# Altium PCB MainBoard.PcbDoc
Units mil, origin at the board's own origin, x right, y up, seen from the top; angles counter-clockwise.
Board outline 3974.39 x 3331.78 mil, 2 copper layers (Top Layer, Bottom Layer); 85 components, 126 nets, 380 pads, 84 vias.
Unrouted connection lines stored in the file: 34.
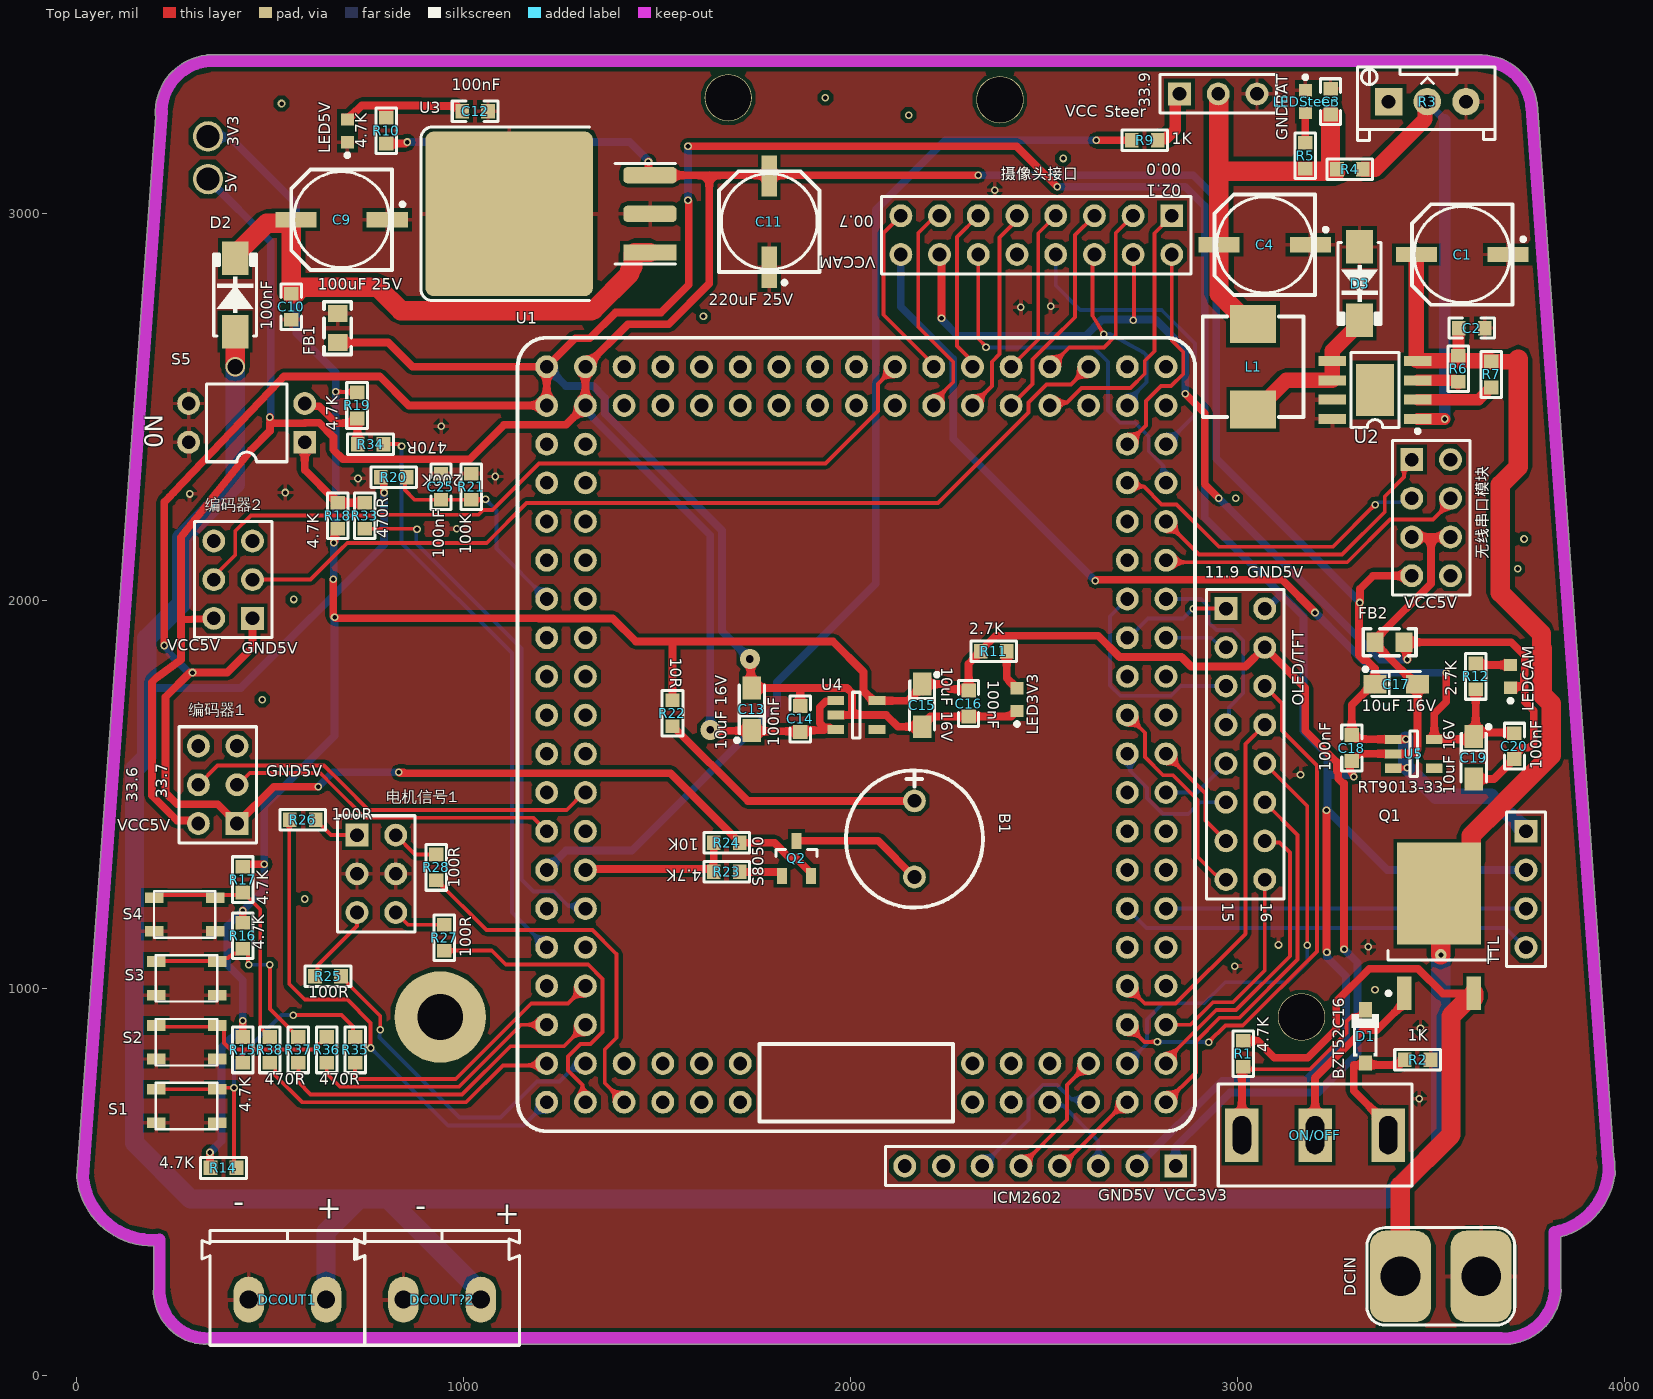
[diagram p0: Top Layer view]
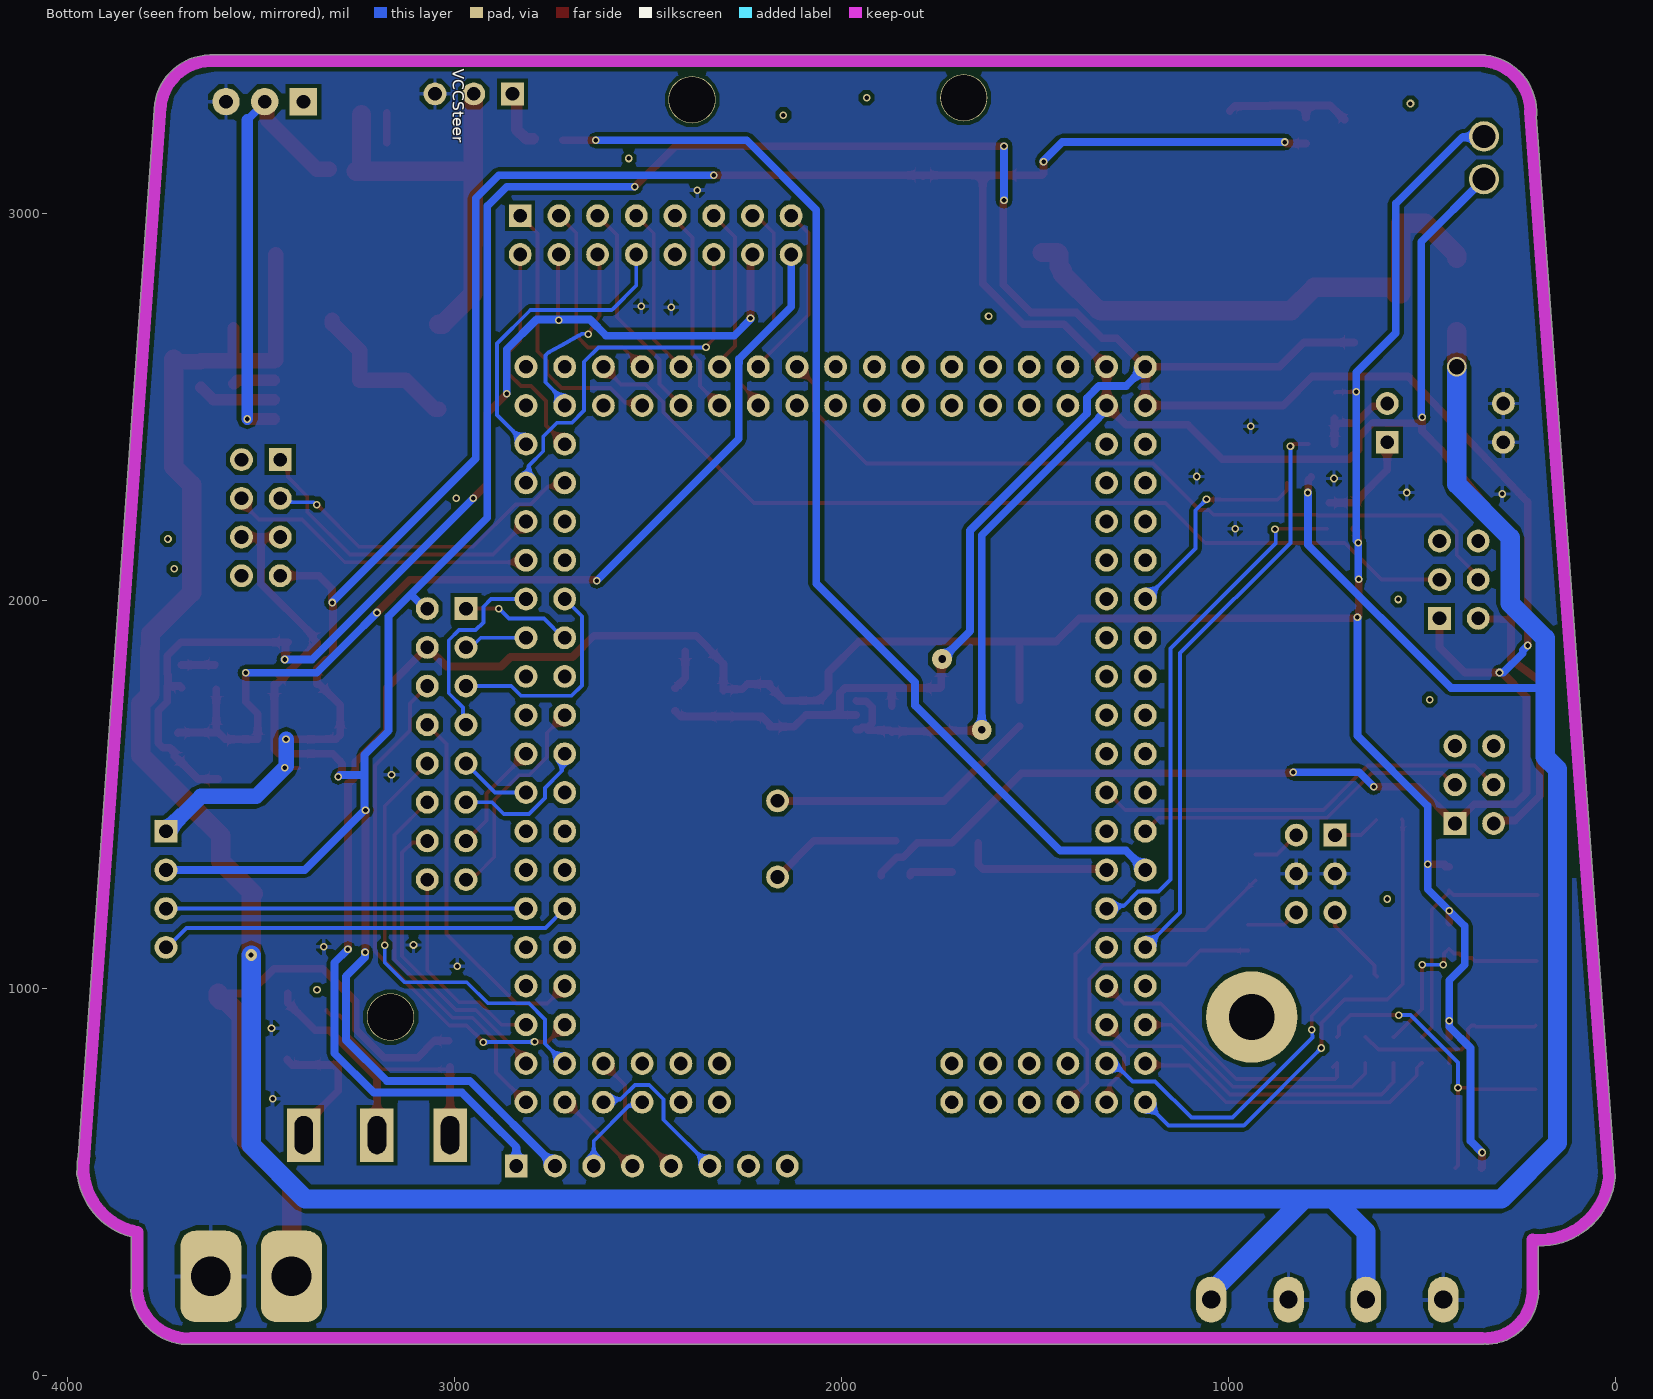
[diagram p1: Bottom Layer view, seen from below]

## Layer stack, top to bottom
Top Solder: solder mask 0.4, Solder Resist, Dk 3.5
Top Layer: signal copper 1.4
Dielectric 1: dielectric 12.6, FR-4, Dk 4.8
Bottom Layer: signal copper 1.4
Bottom Solder: solder mask 0.4, Solder Resist, Dk 3.5

## Board outline
199.24,225.47 199.24,333.31 cw(c196.59,529.76) 1.15,509.74 cw(c16.83,511.35) 1.11,512.55 204.5,3252.14 cw(c220,3255) 204.26,3254.11 cw(c352.5,3262.5) 334.96,3409.94 cw(c340,3395) 340,3410.76 345.08,3410.76 3619.57,3410.76 cw(c3627.5,3262.5) 3775.74,3270.89 cw(c3760,3270) 3775.76,3270 cw(c3760,3270) 3775.75,3269.29 3972.16,565.47 cw(c3788.54,536.76) 3974.39,536.76 cw(c3788.54,536.76) 3974.38,534.88 3975.41,520.76 cw(c3959.69,519.61) 3975.45,519.61 cw(c3959.69,519.61) 3972.52,510.46 cw(c3788.54,536.76) 3835.21,356.86 3835.21,225 cw(c3819.45,225) 3835.19,224.21 cw(c3820,220) 3835.76,220 cw(c3820,220) 3835.74,219.11 cw(c3687.5,227.5) 3679.57,79.24 345,79.24 cw(c345,95) 337.5,81.14 cw(c330,95) 329.04,79.27 cw(c337.5,217.5)

## Design rules (kind name [scope] priority, off if disabled: settings)
Clearance [All] p1: gap=10 ignorepadtopadclearanceinfootprint=FALSE except(0: Arc-Hole Track-Hole SMDPad-Hole THPad-Hole Via-Hole Fill-Hole Poly-Hole Region-Hole Text-Hole)
ComponentClearance [All] p1: gap=-7874.02 collisioncheckmode=3 verticalgap=10 showdistances=FALSE
PolygonConnect [All] p1: connectstyle=Relief reliefconductorwidth=10 reliefentries=4 polygonreliefangle="90 Angle" airgapwidth=10
RoutingVias [All] p1: holewidth=28 width=50 viastyle="Through Hole" minholewidth=28 minwidth=50 maxholewidth=28 maxwidth=50
SolderMaskExpansion [All] p1: expansion=4 istentingtop=FALSE
Width [All] p1: maxlimit=50 minlimit=10 preferedwidth=10
29 further rules are at their usual default settings.

## Components (designator, comment, footprint, x,y, rotation, side; value= is the part's Value field where it differs from the comment)
B1 "BEEP" "BEEP 9x5.5mm" 2165,1385 r270 top
C1 "100uF 25V" CAPS6.3 3580,2895 r0 top
C2 "100NF" CAPC1608[0603]S-N 3605,2705 r180 top
C3 "100NF" CAPC1608[0603]S-N 3240,3290 r270 top
C4 "100uF 25V" CAPS6.3 3070,2920 r0 top
C9 "100uF 25V" CAPS6.3 685,2985 r0 top
C10 "100nF" CAPC1608[0603]S-N 555,2760 r90 top
C11 "220uF 25V" CAPS6.3 1790,2980 r270 top
C12 "100nF" CAPC1608[0603]S-N 1030,3265 r180 top
C13 "10uF 16V" CAPT3216 1745,1720 r90 top
C14 "100nF" CAPC1608[0603]S-N 1870,1695 r270 top
C15 "10uF 16V" CAPT3216 2185,1730 r270 top
C16 "100nF" CAPC1608[0603]S-N 2305,1735 r90 top
C17 "10uF 16V" CAPT3216 3410,1785 r0 top
C18 "100nF" CAPC1608[0603]S-N 3295,1620 r90 top
C19 "10uF 16V" CAPT3216 3610,1595 r270 top
C20 "100nF" CAPC1608[0603]S-N 3715,1625 r90 top
C25 "100nF" CAPC1608[0603]S-N 941.93,2295.06 r270 top
D1 "BZT52C16" SOD-123-L 3330,875 r90 top
D2 "SS54" SMA[DO-214AC] 410,2790.51 r90 top
D3 "SS54" SMA[DO-214AC] 3315,2820 r270 top
DCIN "T型插头" "Wired T-Header ThroughHole" 3525,255 r90 top
DCOUT1 "电机供电接口" "KF/WJ/DG 301-2p-5.0mm" 545,195 r0 top
DCOUT?2 "电机供电接口" "KF/WJ/DG 301-2p-5.0mm" 945,195 r0 top
FB1 "0R" INDC2012[0805]S 675,2705 r270 top
FB2 "0R" INDC2012[0805]S 3392.51,1893.27 r0 top
ICM2602 "Header 8" HDR1X8 2840,540 r180 top
L1 "33UH" "0630 TPC 7*7*3" 3040,2605 r270 top
LED3V3 "GREEN" LEDC1608(0603) 2430,1745 r90 top
LED5V "GREEN" LEDC1608(0603) 700,3214.53 r90 top
LEDCAM "GREEN" LEDC1608(0603) 3705,1805 r90 top
LEDSteer "GREEN" LEDC1608(0603) 3175,3290 r270 top
OLED/TFT "Header 8X2" HDR2X8 2970,1980 r270 top
ON/OFF "SW-SPDT" SS12D10 3200,620 r180 top
Q1 "HY19P03" TO-252AA 3520,1115 r90 top
Q2 "S8050" SOT-23 1860,1335 r90 top
R1 "4.7K" RESC1608[0603]S-N 3015,830 r270 top
R2 "1K" RESC1608[0603]S-N 3465,815 r180 top
R3 "1K" RESPOT3296 3390,3290 r0 top
R4 "1K" RESC1608[0603]S-N 3290,3115 r180 top
R5 "10K" RESC1608[0603]S-N 3175,3150 r270 top
R6 "2.7K" RESC1608[0603]S-N 3570,2600 r270 top
R7 "1K" RESC1608[0603]S-N 3655,2585 r270 top
R9 "1K" RESC1608[0603]S-N 2760,3190 r0 top
R10 "4.7K" RESC1608[0603]S-N 800,3215 r90 top
R11 "2.7K" RESC1608[0603]S-N 2370,1870 r0 top
R12 "2.7K" RESC1608[0603]S-N 3615,1805 r90 top
R14 "4.7K" RESC1608[0603]S-N 380,535 r0 top
R15 "4.7K" RESC1608[0603]S-N 430,840 r270 top
R16 "4.7K" RESC1608[0603]S-N 430,1135 r270 top
R17 "4.7K" RESC1608[0603]S-N 430,1280 r270 top
R18 "4.7K" RESC1608[0603]S-N 675,2220 r90 top
R19 "4.7K" RESC1608[0603]S-N 725,2505 r270 top
R20 "200K" RESC1608[0603]S-N 820,2320 r0 top
R21 "100K" RESC1608[0603]S-N 1020,2295.06 r90 top
R22 "10R" RESC1608[0603]S-N 1540,1710 r270 top
R23 "4.7K" RESC1608[0603]S-N 1680,1300 r0 top
R24 "10K" RESC1608[0603]S-N 1680,1375 r0 top
R25 "100R" RESC1608[0603]S-N 650,1030 r180 top
R26 "100R" RESC1608[0603]S-N 585,1435 r180 top
R27 "100R" RESC1608[0603]S-N 950,1130 r90 top
R28 "100R" RESC1608[0603]S-N 930,1311.54 r270 top
R33 "470R" RESC1608[0603]S-N 745,2220 r270 top
R34 "470R" RESC1608[0603]S-N 760,2405 r0 top
R35 "470R" RESC1608[0603]S-N 720,840 r270 top
R36 "470R" RESC1608[0603]S-N 646.67,840 r270 top
R37 "470R" RESC1608[0603]S-N 573.33,840 r270 top
R38 "470R" RESC1608[0603]S-N 500,840 r270 top
S1 "Button" PTS810-3*4-CurvePin 285,695 r0 top
S2 "Button" PTS810-3*4-CurvePin 285,860 r0 top
S3 "Button" PTS810-3*4-CurvePin 285,1025 r0 top
S4 "Button" PTS810-3*4-CurvePin 280,1190 r0 top
S5 "SW DIP-2" DIP4 440,2460 r90 top
Steer "Header 3" HDR1X3 2850,3310 r0 top
TTL "Header 4" HDR1X4 3745,1405 r270 top
U1 "TC264_CoreBoard" TC264_CoreBoard 1215,2605 r0 top
U2 "AS1015" SOP-8E 3355,2545 r180 top
U3 "SPX2940-5.0" TO-263-3 1300,3000 r90 top
U4 "RT9013-33" SOT-23-5 2015,1705 r0 top
U5 "RT9013-33" SOT-23-5 3455,1605 r0 top
摄像头接口 "Header 8X2" HDR2X8 2830,2995 r180 top
无线串口模块 "Header 4X2" HDR2X4 3450,2365 r270 top
电机信号1 "Header 3X2" HDR2X3 725,1395 r270 top
编码器1 "Header 3X2" HDR2X3 415,1425 r90 top
编码器2 "Header 3X2" HDR2X3 455,1955 r90 top

## Footprints (in the part's own frame and the unit in brackets; to place one, negate y for a bottom-side part, rotate by r counter-clockwise, add the part's x,y. Pads: shape width x height; smd on the part's side, far side on the other; paste and mask are expansions set on the pad)
"0630 TPC 7*7*3" [mm]
  rect 2.5x3 smd: 1(-2.8,0) 2(2.8,0)
  silkscreen extent -3.3,-3.3 3.3,3.3
"BEEP 9x5.5mm" [mm]
  round 1.5 hole 0.9: 1(-2.5,0) 2(2.5,0)
  silkscreen extent -4.5,-4.5 4.5,4.5
CAPC1608[0603]S-N [mm]
  rect 0.9x0.95 smd: 1(-0.85,0) 2(0.85,0)
  silkscreen extent -1.5,-0.66 1.5,0.66
CAPS6.3 [mm]
  rect 2.7x1 smd: 1(-3,0) 2(3,0)
  silkscreen extent -3.3,-3.3 4.13,3.3
CAPT3216 [mm]
  rect 1.5x1.2 smd: 1(-1.4,0) 2(1.4,0)
  silkscreen extent -2.15,-0.9 1.6,1.1
DIP4 [mm]
  rect 1.5x1.5 hole 0.9: 1(-1.27,-3.81)
  round 1.5 hole 0.9: 2(1.27,-3.81) 3(1.27,3.81) 4(-1.27,3.81)
  silkscreen extent -2.55,-2.65 2.55,2.65
HDR1X3 [mm]
  rect 1.5x1.5 hole 0.9: 1(0,0)
  round 1.5 hole 0.9: 2(2.54,0) 3(5.08,0)
  silkscreen extent -1.27,-1.27 6.35,1.27
HDR1X4 [mm]
  rect 1.5x1.5 hole 0.9: 1(0,0)
  round 1.5 hole 0.9: 2(2.54,0) 3(5.08,0) 4(7.62,0)
  silkscreen extent -1.27,-1.27 8.89,1.27
HDR1X8 [mm]
  rect 1.5x1.5 hole 0.9: 1(0,0)
  round 1.5 hole 0.9: 2(2.54,0) 3(5.08,0) 4(7.62,0) 5(10.16,0) 6(12.7,0) 7(15.24,0) 8(17.78,0)
  silkscreen extent -1.27,-1.27 19.05,1.27
HDR2X3 [mm] "Connector; Header; 3x2 Position"
  rect 1.5x1.5 hole 0.9: 1(0,0)
  round 1.5 hole 0.9: 2(0,2.54) 3(2.54,0) 4(2.54,2.54) 5(5.08,0) 6(5.08,2.54)
  silkscreen extent -1.27,-1.27 6.35,3.81
HDR2X4 [mm] "Connector; Header; 4x2 Position"
  rect 1.5x1.5 hole 0.9: 1(0,0)
  round 1.5 hole 0.9: 2(0,2.54) 3(2.54,0) 4(2.54,2.54) 5(5.08,0) 6(5.08,2.54) 7(7.62,0) 8(7.62,2.54)
  silkscreen extent -1.27,-1.27 8.89,3.81
HDR2X8 [mm] "Connector; Header; 8x2 Position"
  rect 1.5x1.5 hole 0.9: 1(0,0)
  round 1.5 hole 0.9: 2(0,2.54) 3(2.54,0) 4(2.54,2.54) 5(5.08,0) 6(5.08,2.54) 7(7.62,0) 8(7.62,2.54) 9(10.16,0) 10(10.16,2.54) 11(12.7,0) 12(12.7,2.54) 13(15.24,0) 14(15.24,2.54) 15(17.78,0) 16(17.78,2.54)
  silkscreen extent -1.27,-1.27 19.05,3.81
INDC2012[0805]S [mm]
  rect 1.1x1.3 smd: 1(-0.948,0) 2(0.948,0)
  silkscreen extent -1.73,-0.89 1.73,0.89
"KF/WJ/DG 301-2p-5.0mm" [mm]
  oval 2x3 hole 1.2: 1(2.54,0) 2(-2.54,0)
  silkscreen extent -5.6,-3 5.08,4.53
LEDC1608(0603) [mm]
  rect 0.8x0.85 smd: A(0.75,0) C(-0.75,0)
  silkscreen extent -1.73,-0.13 -1.48,0.12
PTS810-3*4-CurvePin [mm]
  rect 1.2x0.7 smd: 1(-2,-1.1) 1(2,-1.1) 2(-2,1.1) 2(2,1.1)
  silkscreen extent -2.02,-1.52 2,1.52
RESC1608[0603]S-N [mm]
  rect 0.9x0.95 smd: 1(-0.85,0) 2(0.85,0)
  silkscreen extent -1.5,-0.67 1.5,0.67
RESPOT3296 [mm]
  rect 1.8x1.8 hole 0.9: 1(0,0)
  round 1.8 hole 0.9: 2(5.08,0) ADJ(2.54,0)
  silkscreen extent -2.03,-2.54 6.98,2.29
SMA[DO-214AC] [mm]
  rect 2.2x1.75 smd: A(-2.4,0) K(2.4,0)
  silkscreen extent -2.7,-1.4 2.7,1.4
SOD-123-L [mm]
  rect 1x0.85 smd: A(-1.75,0) K(1.75,0)
  silkscreen extent -1.32,-0.9 1.48,0.9
SOP-8E [mm]
  rect 2.5x3.4 smd: 0(0,0)
  rect 1.8x0.65 smd: 1(-2.8,1.905) 2(-2.8,0.635) 3(-2.8,-0.635) 4(-2.8,-1.905) 5(2.8,-1.905) 6(2.8,-0.635) 7(2.8,0.635) 8(2.8,1.905)
  silkscreen extent -2.93,-2.45 1.58,2.82
SOT-23 [mm]
  rect 1.05x0.65 smd: 1(-1.15,0.95) 2(-1.15,-0.95) 3(1.15,0)
  silkscreen extent 0.13,-1.35 0.58,1.35
SOT-23-5 [mm]
  rect 1.1x0.6 smd: 1(-1.35,0.95) 2(-1.35,0) 3(-1.35,-0.95) 4(1.35,-0.95) 5(1.35,0.95)
  silkscreen extent -0.25,-1.5 0.25,1.5
SS12D10 [mm]
  rect 2.2x3.5 hole 1.2 slot 2.5 at 90 deg mask+0.07: 1(-4.8,0) 2(0,0) 3(4.8,0)
  silkscreen extent -6.35,-3.35 6.35,3.35
TC264_CoreBoard [mm]
  round 1.5 hole 0.9: 1(0,0) 2(2.54,0) 3(0,-2.54) 4(2.54,-2.54) 5(0,-5.08) 6(2.54,-5.08) 7(0,-7.62) 8(2.54,-7.62) 9(0,-10.16) 10(2.54,-10.16) 11(0,-12.7) 12(2.54,-12.7) 13(0,-15.24) 14(2.54,-15.24) 15(0,-17.78) 16(2.54,-17.78) 17(0,-20.32) 18(2.54,-20.32) 19(0,-22.86) 20(2.54,-22.86) 21(0,-25.4) 22(2.54,-25.4) 23(0,-27.94) 24(2.54,-27.94) 25(0,-30.48) 26(2.54,-30.48) 27(0,-33.02) 28(2.54,-33.02) 29(0,-35.56) 30(2.54,-35.56) 31(0,-38.1) 32(2.54,-38.1) 33(0,-40.64) 34(2.54,-40.64) 35(0,-43.18) 36(2.54,-43.18) 37(0,-45.72) 38(2.54,-45.72) 39(0,-48.26) 40(2.54,-48.26) 41(5.08,-48.26) 42(5.08,-45.72) 43(7.62,-48.26) 44(7.62,-45.72) 45(10.16,-48.26) 46(10.16,-45.72) 47(12.7,-48.26) 48(12.7,-45.72) 49(27.94,-45.72) 50(27.94,-48.26) 51(30.48,-45.72) 52(30.48,-48.26) 53(33.02,-45.72) 54(33.02,-48.26) 55(35.56,-45.72) 56(35.56,-48.26) 57(38.1,-48.26) 58(40.64,-48.26) 59(38.1,-45.72) 60(40.64,-45.72) 61(38.1,-43.18) 62(40.64,-43.18) 63(38.1,-40.64) 64(40.64,-40.64) 65(38.1,-38.1) 66(40.64,-38.1) 67(38.1,-35.56) 68(40.64,-35.56) 69(38.1,-33.02) 70(40.64,-33.02) 71(38.1,-30.48) 72(40.64,-30.48) 73(38.1,-27.94) 74(40.64,-27.94) 75(38.1,-25.4) 76(40.64,-25.4) 77(38.1,-22.86) 78(40.64,-22.86) 79(38.1,-20.32) 80(40.64,-20.32) 81(38.1,-17.78) 82(40.64,-17.78) 83(38.1,-15.24) 84(40.64,-15.24) 85(38.1,-12.7) 86(40.64,-12.7) 87(38.1,-10.16) 88(40.64,-10.16) 89(38.1,-7.62) 90(40.64,-7.62) 91(38.1,-5.08) 92(40.64,-5.08) 93(38.1,-2.54) 94(40.64,-2.54) 95(38.1,0) 96(40.64,0) 97(35.56,-2.54) 98(35.56,0) 99(33.02,-2.54) 100(33.02,0) 101(30.48,-2.54) 102(30.48,0) 103(27.94,-2.54) 104(27.94,0) 105(25.4,-2.54) 106(25.4,0) 107(22.86,-2.54) 108(22.86,0) 109(20.32,-2.54) 110(20.32,0) 111(17.78,-2.54) 112(17.78,0) 113(15.24,-2.54) 114(15.24,0) 115(12.7,-2.54) 116(12.7,0) 117(10.16,-2.54) 118(10.16,0) 119(7.62,-2.54) 120(7.62,0) 121(5.08,-2.54) 122(5.08,0)
  silkscreen extent -1.91,-50.16 42.55,1.91
TO-252AA [mm]
  rect 6.7x5.5 smd: 1(3.275,0)
  rect 2.2x0.95 smd: 2(-3.275,2.28) 3(-3.275,-2.28)
  silkscreen extent -3.4,-3.35 -0.47,3.43
TO-263-3 [mm]
  rect 1.07x3.5 smd: 1(-2.54,-4.623)
  rrect10% 10.8x11 smd: 2(0,4.623)
  rrect50% 1.07x3.5 smd: 2(0,-4.623) 3(2.54,-4.623)
  silkscreen extent -5.7,-6.27 5.7,10.42
"Wired T-Header ThroughHole" [mm]
  rrect50% 6x4 hole 2.6: 1(0,2.65) 2(0,-2.65)
  silkscreen extent -3.2,-4.85 3.2,4.85

## Part data
B1: "蜂鸣器"
C1 C4 C9 C11: library part Cap-Solid, "Polarized Capacitor (Radial)"
C2 C3: library part "0805 1uF (105) 10% 50V", "贴片电容"
C10 C12 C14 C16 C18 C20 C25: library part CAP, "电容"
C13 C15 C17 C19: library part Cap-Tan, "Tantalum Capacitor"
D1: library part "Diode TVS Uni-Dir", "TRANSIENT VOLTAGE  SUPPRESSOR DIODE"
D2 D3: library part Diode, "普通二极管 Diode"
DCIN: library part T_Header
DCOUT1 DCOUT?2: library part "KF/WJ/DG 30x", "接线端子 2Pin"
FB1 FB2: library part "Ind Chip 2", "Chip Inductor, Ferrite-Core, Silkscreen Border"
ICM2602: "Header, 8-Pin"
L1: library part "1206 10uH 10%", "贴片电感"
LED3V3 LED5V LEDCAM LEDSteer: library part "LED Chip Green", "Typical Chip LED"
OLED/TFT 摄像头接口: "Header, 8-Pin, Dual row"
ON/OFF: "单刀双掷开关 3脚船型、钮子、拨动开关 SPDT Subminiature Toggle Switch"
Q1: "HY19P03 P-Channel MOSFET"
Q2: library part "NPN S8050", "Discrete NPN Bipolar Transistor"
R1 R2 R9 R10 R11 R12 R14 R15 R16 R17 R18 R19 R20 R21 R22 R23 R24 R25 R26 R27 R28 R33 R34 R35 R36 R37 R38: library part RES, "电阻"
R3: library part "Res Adj 3p", "可调电阻"
R4 R5 R6 R7: library part "0805 1KΩ (1001) 1%", "贴片电阻"
S1 S2 S3 S4: library part KEY, "按键"
S5: library part "Code SW-2", "2位拨码开关"
Steer: "Header, 3-Pin"
TTL: "Header, 4-Pin"
U1: "逐飞科技TC264核心板"
U3: library part LM2940-5.0, "5V LDO TO-263-3"
U4 U5: "3.3V 500mA SOT-23-5 LDO"
无线串口模块: "Header, 4-Pin, Dual row"
电机信号1 编码器1 编码器2: "Header, 3-Pin, Dual row"

## Free pads (board coordinates)
  round 78.74 hole 59.06: ""(340,3090) ""(340,3200)
  round 236.22 hole 118.11: ""(940,925)
  round 122.05 hole 118.11: ""(1683.94,3300) ""(2386.06,3295) ""(3165,925)

## Via types
v1: diameter 19.68, hole 11.81, Top Layer to Bottom Layer, tented both sides, 80 vias
v2: diameter 51, hole 19.68, Top Layer to Bottom Layer, tented both sides, 2 vias
v3: diameter 50, hole 40, Top Layer to Bottom Layer, tented both sides, 1 vias
v4: diameter 30, hole 13, Top Layer to Bottom Layer, tented both sides, 1 vias

## Nets (pads, with @x,y where several pads share a name; then routed paths per layer and width w, separated by ;. In a path a pad name is that pad's centre, name@x,y a point inside that pad or via, vN(x,y) a via of type N, cw(c..) or ccw(c..) an arc to the next point about the centre after c; other vN are vias at no path point)
00.0: U1.99 摄像头接口.1 | length 715.9
  Top Layer w10: U1.99 2522.5,2512.5 2559.53,2512.5 2597.03,2550 2722.97,2550 2760,2587.03 2760,2620 2785,2645 2785,2950 摄像头接口.1
00.1: U1.100 摄像头接口.3 | length 531.8
  Top Layer w10: U1.100 2565,2655 2655,2655 2685,2685 2685,2950 摄像头接口.3
00.2: U1.101 摄像头接口.5 | length 579.1
  Top Layer w10: U1.101 2470.47,2560.47 2470.47,2623.44 2522.03,2675 2580,2732.97 2580,2945 摄像头接口.5
00.3: U1.102 摄像头接口.7 | length 437.6
  Top Layer w10: U1.102 2485,2675 2485,2950 摄像头接口.7
00.4: U1.103 摄像头接口.9 | length 537.6
  Top Layer w10: U1.103 2365,2555 2365,2617.97 2385,2637.97 2385,2939.16 2430,2984.16 摄像头接口.9
00.5: U1.104 摄像头接口.11 | length 429.4
  Top Layer w10: U1.104 2315,2618.27 2275,2658.27 2275,2940 摄像头接口.11
00.6: U1.105 摄像头接口.13 | length 577.5
  Top Layer w10: U1.105 2215,2514.92 2245.7,2545.62 ; 摄像头接口.13 2219.25,2995 2175,2950.75 2175,2707.99 2265.48,2617.51 2265.48,2565.36 2245.74,2545.62
00.7: U1.106 摄像头接口.15 | length 462.1
  Top Layer w10: 摄像头接口.15 2085.47,2950.49 2085.47,2895 2085.47,2739.21 2215,2609.69 U1.106
00.9: U1.108 编码器2.4 | length 2073.1
  Top Layer w10: 编码器2.4@347.13,2055 410.47,2118.34 410.47,2180.47 450.75,2220.75 769.91,2220.75 771.81,2222.64 1038.68,2222.64 1051.04,2235 1075,2235 1195,2355 1935,2355 2070.47,2490.47 2070.47,2560.47 U1.108
02.0: U1.90 摄像头接口.12 | length 976.1
  Top Layer w10: 摄像头接口.12 2330,2677.2 2350,2657.2 v1(2350,2655)
  Bottom Layer w10: v1(2350,2655) 2350.16,2655.16 2627.81,2655.16 2665,2617.97 2665,2492.03 2696.56,2460.47 2734.53,2460.47 2770.47,2424.53 2770.47,2386.56 2807.5,2349.53 2807.5,2312.5 U1.90
02.1: U1.91 摄像头接口.2 | length 577.3
  Top Layer w10: U1.91 2763.21,2453.21 2763.21,2516.18 2802.03,2555 2827.97,2555 2859.53,2586.56 2859.53,2643.53 2830,2673.06 摄像头接口.2
02.2: U1.92 摄像头接口.8 | length 793.1
  Bottom Layer w10: 摄像头接口.8 2530,2815 2590.47,2754.53 2593.39,2751.61 2597.9,2751.61 2608.17,2751.98 2610.32,2752.06 2616.59,2752.06 2798.3,2752.06 2798.86,2751.97 2799.05,2751.94 2803.79,2751.21 2806.72,2748.28 2890,2665 2890,2480 U1.92
02.3: U1.93 摄像头接口.6 | length 493.3
  Top Layer w10: 摄像头接口.6 2625,2890 2625,2737.13 v1(2653.75,2688.98)
  Bottom Layer w10: v1(2653.75,2688.98) 2654.92,2690.16 2669.84,2690.16 2672.25,2688.83 2677.19,2686.09 2677.46,2685.95 ; 2677.49,2685.93 2689.04,2679.54 2720.08,2662.36 2754.13,2643.53 2757.62,2641.6 2765,2634.22 2765,2565 2715,2515 U1.93
02.4: U1.94
02.5: U1.95
02.6: U1.96
02.7: U1.97
02.8: U1.98 编码器2.3 | length 2403
  Top Layer w10: 编码器2.3 604.64,2055 679.64,2130 699.64,2150 1060,2150 1162.72,2252.72 2225.69,2252.72 2459.53,2486.56 2459.53,2512.5 2506.56,2559.53 2569.53,2559.53 U1.98
10.1: U1.85
10.2: U1.86 无线串口模块.4 | length 805.6
  Top Layer w10: U1.86 2820,2100 3283.22,2100 3393.22,2210 3505,2210 无线串口模块.4@3553.08,2258.08
10.3: U1.87
10.5: U1.88 无线串口模块.1 | length 809.8
  Top Layer w10: U1.88 2900,2120 3270,2120 3380,2230 3380,2270 3430,2320 3430,2345 无线串口模块.1
10.6: U1.89 无线串口模块.3 | length 851.5
  Top Layer w10: U1.89 2724.39,2295.61 2757.66,2295.61 2803.75,2249.53 2842.19,2249.53 2951.72,2140 3246.23,2140 v1(3355.16,2248.93)
  Bottom Layer w10: v1(3355.16,2248.93) 3357.78,2248.93 3363.85,2255 3419.61,2255 3420.23,2255.61 3449.39,2255.61 无线串口模块.3@3450,2255
11.9: OLED/TFT.1 U1.81 | length 286.2
  Top Layer w10: v1(2885.16,1980.16) 2969.84,1980.16 OLED/TFT.1
  Bottom Layer w10: U1.81 2718.92,1905 2768.26,1954.35 2859.34,1954.35 v1(2885.16,1980.16)
11.10: OLED/TFT.3 U1.82 | length 165.4
  Bottom Layer w10: U1.82 2932.03,1905 2957.03,1880 OLED/TFT.3
11.11: OLED/TFT.5 U1.83 | length 562.8
  Bottom Layer w10: U1.83 2670.47,1960.47 2670.47,1781.56 2697.03,1755 2827.97,1755 2852.97,1780 OLED/TFT.5
11.12: OLED/TFT.7 U1.84 | length 504.1
  Bottom Layer w10: U1.84 2905,2005 2925,1985 2925,1944.73 2945.2,1924.53 2988.44,1924.53 3014.53,1898.44 3014.53,1761.56 2977.5,1724.53 2977.5,1687.5 OLED/TFT.7
13.0: OLED/TFT.9 U1.74 | length 186.1
  Bottom Layer w10: U1.74 2895,1505 OLED/TFT.9
13.1: OLED/TFT.11 U1.75 | length 368.5
  Bottom Layer w10: U1.75 2722.5,1597.5 2722.5,1560.47 2765.94,1517.03 2765.94,1491.08 2807.03,1450 2872.58,1450 2902.58,1480 OLED/TFT.11
13.2: OLED/TFT.13 U1.76 | length 303.5
  Top Layer w10: U1.76 2917.03,1502.97 2917.03,1432.97 OLED/TFT.13@2980.08,1369.92
13.3: OLED/TFT.15 U1.77 | length 569.8
  Top Layer w10: U1.77 2760.47,1659.53 2760.47,1596.56 2807.5,1549.53 2833.44,1549.53 2897.03,1485.94 2897.03,1337.97 2941.01,1293.99 2942.74,1293.99 2975.61,1261.11 OLED/TFT.15@2975.61,1259.39
14.0: TTL.4 U1.67 | length 1071.4
  Bottom Layer w10: U1.67 2765,1155 3692.03,1155 3742.03,1105 TTL.4
14.1: TTL.3 U1.68 | length 930
  Bottom Layer w10: U1.68 TTL.3
15.0: OLED/TFT.12 U1.58 | length 981.3
  Top Layer w10: U1.58 2892.15,782.15 2892.15,862.15 2953.21,923.21 3004.92,923.21 3155,1073.28 3155,1395 OLED/TFT.12
15.1: OLED/TFT.10 U1.59 | length 1169.4
  Top Layer w10: OLED/TFT.10 3179.84,1470.16 v1(3179.84,1110)
  Bottom Layer w10: U1.59 2765.94,855.94 2765.94,918.92 2807.5,960.47 2913.44,960.47 2967.97,1015 3128.99,1015 3179.84,1065.85 v1(3179.84,1110)
15.2: OLED/TFT.14 U1.60 | length 785
  Top Layer w10: U1.60 2815,813.28 2944.92,943.21 2996.18,943.21 3135,1082.03 3135,1350 3108.67,1376.33 3073.67,1376.33 OLED/TFT.14
15.3: OLED/TFT.6 U1.61 | length 1346.8
  Top Layer w10: U1.61 2759.16,860.84 v1(2792.92,860.84) ; v1(2925.07,859.93) 2925.07,860.07 2968.21,903.21 3013.21,903.21 3204.69,1094.68 3204.69,1575.32 3115,1665 3115,1735 OLED/TFT.6
  Bottom Layer w10: v1(2792.92,860.84) 2793.34,860.42 2924.58,860.42 v1(2925.07,859.93)
15.4: OLED/TFT.16 U1.62 | length 547.8
  Top Layer w10: U1.62 2878.43,905 2936.64,963.21 2987.89,963.21 3070,1045.31 OLED/TFT.16
15.5: OLED/TFT.8 U1.63 | length 958.9
  Top Layer w10: U1.63 2760,960 2840,960 3020,1140 3020,1630 OLED/TFT.8
20.0: U1.44
20.3: U1.46
20.11: ICM2602.3 U1.54 | length 231.4
  Bottom Layer w10: U1.54 2523.99,696.01 2548.99,696.01 2640,605 ICM2602.3
20.12: ICM2602.5 U1.55 | length 337.5
  Top Layer w10: ICM2602.5 2559.53,659.53 2559.53,749.53 U1.55
20.13: ICM2602.6 U1.56 | length 411.3
  Bottom Layer w10: ICM2602.6 2459.53,659.53 2459.53,712.5 2496.56,749.53 2533.44,749.53 2570.47,712.5 2607.5,712.5 U1.56
20.14: ICM2602.4 U1.57 | length 243.3
  Top Layer w10: ICM2602.4 2545,540 2710,705 U1.57
21.2: R25.1 U1.38 | length 875.7
  Top Layer w10: R25.1 683.46,1029.02 784.84,927.64 v1(784.84,892.51)
  Bottom Layer w10: v1(784.84,892.51) 783.82,881.59 783.33,876.28 783.33,871.67 990,665 1096.08,665 1189.52,758.44 1248.44,758.44 1295,805 U1.38
21.3: R26.2 U1.39 | length 1304.8
  Top Layer w10: R26.2 550,1433.46 550,1010 590,970 700,970 760,910 v1(760,845)
  Bottom Layer w10: v1(760,845) 760.5,845 960.5,645 1155,645 U1.39
21.4: R27.1 U1.40 | length 828.8
  Top Layer w10: R27.1 1073.2,1096.54 1109.26,1060.47 1322.5,1060.47 1359.53,1023.44 1359.53,886.56 1327.97,855 1302.03,855 1270.47,823.44 1270.47,786.56 1307.5,749.53 1307.5,712.5 U1.40
21.5: R28.2 U1.41 | length 959.8
  Top Layer w10: R28.2 930.98,1278.07 1059.53,1149.53 1333.44,1149.53 1392.07,1090.9 1395,1087.97 1395,871.45 1365,841.45 1365,755 U1.41
22.0: R35.2 U1.34 | length 747.6
  Top Layer w10: R35.2@730.32,796.21 R35.2 720,770 725,765 980,765 1175,960 1270,960 U1.34
22.1: R36.2 U1.35 | length 676
  Top Layer w10: R36.2 646.67,779.33 681,745 988.28,745 1148.28,905 U1.35
22.2: R37.2 U1.36 | length 879.2
  Top Layer w10: R37.2 573.33,756.67 605,725 996.57,725 1121.1,849.53 1259.53,849.53 U1.36
22.3: R38.2 U1.37 | length 810.2
  Top Layer w10: R38.2 500.98,806.54 513.7,793.82 513.7,773.82 582.52,705 1007.27,705 1102.27,800 1210,800 U1.37
33.6: U1.24 编码器1.4 | length 1087
  Top Layer w10: 编码器1.4 365,1575 640,1575 690,1525 755,1460 1266.72,1460 1311.72,1505 U1.24
33.7: U1.25 编码器1.3 | length 874.6
  Top Layer w10: 编码器1.3 417.97,1525 447.97,1555 630,1555 665,1520 745,1440 1180,1440 U1.25
33.9: R9.1 U1.27 | length 2886.2
  Top Layer w20: v1(2635,3190) R9.1@2720,3190
  Bottom Layer w20: U1.27 1265,1355 1435,1355 1810,1730 1810,1790 2065,2045 2065,3010 2245,3190 v1(2635,3190)
33.10: R23.1 R24.1 U1.28 | length 393.3
  Top Layer w20: U1.28 1317.5,1307.5 1635.02,1307.5 1646.54,1319.02 R24.1
33.12: R33.2 U1.30 | length 1350.1
  Top Layer w10: R33.2 878.46,2186.54 v1(880,2185)
  Bottom Layer w10: v1(880,2185) 878.15,2183.15 878.15,2148.57 1150,1876.72 1150,1280 1180.47,1249.53 1233.44,1249.53 1270.47,1212.5 1307.5,1212.5 U1.30
33.13: R34.2 U1.31 | length 1498.9
  Top Layer w10: R34.2 832.38,2405 837.38,2400 v1(840,2400)
  Bottom Layer w10: v1(840,2400) 840,2150 1125,1865 1125,1195 U1.31
A0: U1.21
A1: U1.20
A2: U1.19
A3: U1.18
A4: U1.17
A5: U1.16
A6: U1.15
A7: U1.14
A8: C25.2 R20.2 R21.1 U1.13 | length 560.6
  Top Layer w10: R20.2@848.46,2305 848.46,2286.54 873.46,2261.54 941.93,2261.54 1019.95,2261.54 R21.1 1055.69,2261.59 1056.59,2262.49 v1(1056.86,2262.49)
  Bottom Layer w10: v1(1056.86,2262.49) 1085,2234.35 1085,2135 U1.13
A10: U1.12
A11: U1.11
A12: U1.10
A13: U1.9
A16: U1.8
A17: U1.7
A20: U1.6
A21: U1.5
GND5V: C13.2 C14.1 C15.2 C16.1 C17.2 C18.1 FB1.2 FB2.1 ICM2602.2 LED3V3.C OLED/TFT.2 Q2.2 R24.2 TTL.2 U1.1 U1.3 U4.2 U5.2 无线串口模块.5 无线串口模块.6 编码器1.1 编码器2.1 | length 13637.5
  Top Layer w20: v1(227.17,1884.84) 227.17,2255.32 239.82,2267.98 ccw(c225.67,2282.12) 240.18,2268.34 251.41,2280.17 524.05,2567.16 536.25,2580 783.4,2580 858.4,2505 U1.3 U1.1 ; 编码器2.1 455,1880 390,1815 293.37,1815 230,1751.63 230,1505 260.24,1474.76 365.24,1474.76 编码器1.1 510,1520 v1(625,1520) ; FB1.2 805.76,2667.69 868.45,2605 U1.1 ; 845,1557.32 v1(832.68,1557.32) 835.47,1554.53 1534.92,1554.53 1713.46,1375.98 R24.2 1803.53,1375 1840.83,1337.7 1857.3,1337.7 1897.4,1297.6 Q2.2 ; v1(1580,3035) 1582.32,3032.68 1582.32,2817.32 1510,2745 1392.81,2745 1326.55,2678.74 1288.74,2678.74 U1.1 ; v1(1580,3175) 2428.79,3175 v1(2533.79,3070) ; v2(1740,1850) 1742.5,1847.5 1742.5,1777.62 C13.2 1867.94,1775.12 ; C14.1 1870,1773.06 1867.94,1775.12 ; U4.2 2015,1705 ; LED3V3.C 2429.02,1715.47 2415.08,1701.54 C16.1 2205.75,1701.54 2185,1680.79 C15.2 2122.61,1674.88 2092.5,1705 2015,1705 ; v1(3229.69,1459.52) 3229.69,1093.93 v1(3230.78,1092.83) ; v1(3299.93,1545.63) 3290.15,1564.14 3290.15,1578.82 C18.1 3295.98,1586.54 3314.45,1605 U5.2 3453.28,1605 3465,1616.72 3465,1784.88 C17.2 3459.21,1785 3440.59,1803.62 3440.59,1804.41 3367.32,1877.68 3366.86,1877.68 3355.21,1889.34 FB2.1 3364.69,1902.76 3364.69,1909.65 3499.53,2044.48 3499.53,2165 ; 无线串口模块.5 3499.53,2165 ; 无线串口模块.6 3499.53,2165 ; 1867.94,1775.12 1990.88,1775.12 2003.5,1762.5 2003.5,1716.5 2015,1705
  Bottom Layer w20: v1(227.17,1884.84) 240,1872.01 240,1865 290,1815 v1(300,1815) ; v1(625,1520) 662.32,1557.32 v1(832.68,1557.32) ; U1.1 1264.53,2555.47 1334.57,2555.47 1365.47,2524.57 1365.47,2484.49 1499.96,2350 1667.84,2182.11 1667.84,1922.16 v2(1740,1850) ; v1(1580,3035) v1(1580,3175) ; v1(2533.79,3070) 2865,3070 2915,3020 2915,2215 3112.5,2017.5 ; ICM2602.2 2960,760 3175,760 3280,865 3280,1030 3230.78,1079.22 v1(3230.78,1092.83) ; OLED/TFT.2 3075,1980 3112.5,2017.5 ; v1@3228.42,1459.52 3232.07,1459.52 3386.59,1305 TTL.2 ; v1(3229.69,1459.52) 3229.69,1460.79 3232.07,1463.17 3232.07,1550 ; v1(3299.93,1545.63) 3295.56,1550 3232.07,1550 ; 3112.5,2017.5 3170,1960 3170,1665 3232.07,1602.93 3232.07,1550
GNDBAT: C1.2 C2.1 C3.1 C4.2 C9.2 C10.1 C11.2 C12.1 C25.1 D3.A DCIN.2 DCOUT1.2 DCOUT?2.2 FB1.1 LED5V.C LEDSteer.C R2.1 R3.2 R21.2 S1.1 S2.1 S3.1 S4.1 S5.3 S5.4 Steer.3 U2.7 U2.8 U3.2 电机信号1.3 电机信号1.4
  other v1: 3469.36,714.04 3472.48,896.38 2992.48,1056.38 3337.48,1106.38 3105.7,1111.22 3162.48,1551.38 982.48,2186.38 292.48,2276.38 540,2280 727.48,2316.38 1082.48,2321.38 942.48,2451.38 2439.66,2758.33 2517.48,2761.38 2372.48,3061.38
GNDCAM: C19.2 C20.1 FB2.2 LEDCAM.C 摄像头接口.4 摄像头接口.14 | length 2969.6
  Top Layer w10: v1(2730,2725) 2731.85,2726.85 2731.85,2893.15 摄像头接口.4
  Top Layer w20: 摄像头接口.14 2235,2890 v1(2235,2730) ; v1(2865,2535) 2915,2485 2915,2301.4 v1(2951.4,2265) ; v1(3438.71,1848.71) 3436.46,1850.96 3436.46,1886.63 FB2.2 3707.02,1893.27 3741.73,1858.56 3741.73,1810.5 3740,1808.76 3740,1780 ; C19.2 3662.36,1539.88 3714.02,1591.54 C20.1 3715.98,1591.54 3723.7,1599.25 3723.7,1609.03 3735.42,1620.75 3753.28,1620.75 3765,1632.46 3765,1716.46 3741.73,1739.72 3741.73,1780 3740,1780 ; LEDCAM.C 3709.53,1780 3740,1780
  Bottom Layer w20: v1(2235,2730) 2235,2727.44 2277.44,2685 2608.05,2685 2608.05,2685.49 2649.62,2727.06 2727.94,2727.06 v1(2730,2725) 2732.06,2727.06 2787.94,2727.06 2865,2650 v1(2865,2535) ; v1(2951.4,2265) 3368.02,1848.37 3438.37,1848.37 v1(3438.71,1848.71)
GNDOP: 
NetB1_1: B1.1 R22.2 | length 705
  Top Layer w20: R22.2 1540.98,1676.54 1734.09,1483.43 B1.1
NetB1_2: B1.2 Q2.3 | length 343.8
  Top Layer w20: Q2.3 2071.3,1380.28 B1.2
NetC9_1: C9.1 C10.2 D2.K U3.1 | length 1415
  Top Layer w50: D2.K 410,2893.86 491.46,2975.31 555,2975.31 C10.2 566.36,2793.46 582.9,2810 778.35,2810 838.35,2750 1330,2750 1332.4,2752.4 1336.57,2752.4 1430,2845.83 1430,2855 1438.11,2863.11 1438.11,2896.06 1442.05,2900 U3.1
NetC12_2: C12.2 LED5V.A R10.2 | length 349.8
  Top Layer w20: LED5V.A 700.98,3244.06 736.93,3280 800,3280 ; R10.2 800,3280 ; C12.2 996.54,3265.98 983.82,3278.7 892.56,3278.7 891.26,3280 800,3280
NetD1_A: D1.A ON/OFF.1 R2.2 | length 355.8
  Top Layer w20: ON/OFF.1 3388.98,645.59 3300,734.57 3300,801.1 3418.62,801.1 3431.54,814.02 R2.2
NetD1_K: D1.K ON/OFF.3 R1.2 | length 577
  Top Layer w10: R1.2 3021.54,790 3186.72,790 3280.86,884.15 3280.86,913.71 3296.37,929.21 3318.27,929.21 3330,940.95 D1.K
  Top Layer w20: ON/OFF.3 R1.2@3011.02,796.54
NetD3_K: D3.K L1.2 U2.5 U2.6 | length 420.5
  Top Layer w40: L1.2 3049.84,2494.76 3125.08,2570 3221.57,2570 U2.6 3245,2570.24 3245,2646.65 3315,2716.65 D3.K
NetDCIN_1: DCIN.1 Q1.3 R1.1 | length 1578.9
  Top Layer w20: R1.1 3051.54,863.46 3095,820 3181.36,820 3225,863.64 3255,893.64 3255,965 3340,1050 3465.91,1050 3529.85,986.06 Q1.3@3605.67,986.06
  Top Layer w50: DCIN.1@3420,265 3420,489.32 3551.18,620.5 3551.18,927.48 3591.46,967.76 3603.46,967.76 3609.76,974.06 Q1.3
NetLED3V3_A: LED3V3.A R11.2 | length 107
  Top Layer w20: R11.2 2403.46,1800.08 2429.02,1774.53 LED3V3.A
NetLEDCAM_A: LEDCAM.A R12.2 | length 91.6
  Top Layer w10: R12.2 R12.2@3618.94,1834.53
  Top Layer w20: R12.2@3618.94,1834.53 LEDCAM.A
NetLEDOP_A: 
NetLEDSteer_A: LEDSteer.A R5.1 | length 77
  Top Layer w20: R5.1 LEDSteer.A
NetON/OFF_2: ON/OFF.2 Q1.2 | length 482.9
  Top Layer w20: ON/OFF.2 3200,767.93 3322.98,890.91 3359.69,890.91 3430.24,961.46 Q1.2
NetQ2_1: Q2.1 R23.2 | length 117.8
  Top Layer w20: R23.2 1819.8,1300 1822.6,1297.2 Q2.1
NetR3_ADJ: R3.ADJ R4.1 U2.1 | length 1170.9
  Top Layer w30: U2.1 v1(3535,2470)
  Top Layer w40: R4.1 3355,3115 3484.09,3244.09 3484.09,3284.09 R3.ADJ
  Bottom Layer w20: R3.ADJ 3490,3287.46 3535,3242.46
  Bottom Layer w30: v1(3535,2470) 3535,3242.46
NetR6_2: R6.2 U2.3 | length 108.3
  Top Layer w30: U2.3 3560.55,2570 3569.02,2561.54 R6.2@3570,2561.54
NetR7_2: R7.2 U2.2 | length 202.8
  Top Layer w30: U2.2 3622.48,2520 3654.02,2551.54 R7.2
NetR9_2: R9.2 Steer.1 | length 149.5
  Top Layer w30: R9.2@2796.18,3193.7 2814.73,3193.7 2838.61,3217.57 2838.61,3298.61 Steer.1
NetR14_2: R14.2 R35.1 S1.2 | length 877
  Top Layer w10: S1.2@206.26,738.31 363.74,738.31 367.63,742.2 v1(407.2,742.2) 407.2,541.27 R14.2 ; v1(560,930) 685,930 714.68,900.32 714.68,878.79 R35.1
  Bottom Layer w10: v1(407.2,742.2) 407.2,807.2 530,930 v1(560,930)
NetR15_2: R15.2 R36.1 S2.2 | length 538.7
  Top Layer w10: S2.2@206.26,903.31 209.57,900 360.43,900 363.74,903.31 372.32,903.31 381.1,894.53 381.1,857.95 398.3,840.75 429.02,840.75 ; R15.2 429.02,807.52 429.02,840.75 ; R36.1 645.68,873.46 612.97,840.75 429.02,840.75
NetR16_2: R16.2 R37.1 S3.2 | length 559
  Top Layer w10: S3.2@203.85,1070 363.74,1070 370.83,1077.09 392.09,1077.09 404.45,1089.45 417.92,1089.45 R16.2 ; R16.2@430.98,1101.54 443.7,1088.82 443.7,1061.3 v1(445,1060) ; v1(499.84,1060) 499.84,945.97 572.35,873.46 R37.1
  Bottom Layer w10: v1(445,1060) v1(499.84,1060)
NetR17_2: R17.2 R38.1 S4.2 | length 636.5
  Top Layer w10: S4.2@201.49,1240 418.46,1240 R17.2@430,1251.54 ; R17.2 430.98,1246.54 475,1202.52 475,897.48 499.02,873.46 R38.1
NetR18_2: R18.2 R33.1 S5.1 | length 257.3
  Top Layer w20: S5.1 590,2338.46 666.3,2262.16 666.3,2261.18 674.02,2253.46 R33.1@740,2253.46
NetR19_2: R19.2 R34.1 S5.2 | length 223.9
  Top Layer w20: S5.2 597.21,2502.79 626.97,2502.79 670.95,2458.82 R19.2@725.98,2458.82 ; R19.2@725.98,2471.54 R19.2@725.98,2458.82 ; R34.1 725.98,2405.55 R19.2@725.98,2458.82
NetR25_2: R25.2 电机信号1.5 | length 209.9
  Top Layer w10: R25.2 622.84,1036.31 622.84,1057.84 725,1160 电机信号1.5
NetR26_1: R26.1 电机信号1.1 | length 122.7
  Top Layer w10: R26.1@618.46,1434.02 657.48,1395 电机信号1.1
NetR27_2: R27.2 电机信号1.6 | length 138.1
  Top Layer w10: 电机信号1.6 856.54,1163.46 R27.2
NetR28_1: R28.1 电机信号1.2 | length 125.7
  Top Layer w10: 电机信号1.2 875,1345 R28.1
NetR29_2: 
NetR30_1: 
NetR31_2: 
NetR32_1: 
Net电磁接口1_1: 
Net电磁接口1_3: 
Net电磁接口1_4: 
Net电磁接口1_6: 
Net电磁接口2_1: 
Net电磁接口2_3: 
Net电磁接口2_4: 
Net电磁接口2_6: 
VCC3V3: C15.1 C16.2 ICM2602.1 OLED/TFT.4 pad.@340,3200 R11.1 R14.1 R15.1 R16.1 R17.1 R18.1 R19.1 R22.1 U4.5 | length 7859
  Top Layer w10: v1(670,2540) 723.46,2540 R19.1
  Top Layer w20: v1(345,575) 345,536.54 R14.1 ; R15.1 v1(430,915) ; R16.1 v1(430,1200) ; R17.1 440,1313.46 441.65,1320 v1(485,1320) ; v1(663.79,2056.21) 663.79,1961.21 670,1955 1194.96,1955 1195.43,1954.53 1385.97,1954.53 1445,1895.5 1540,1895.5 ; v1(664.67,2150.38) 666.3,2152.01 666.3,2178.82 674.02,2186.54 R18.1 ; R22.1 1540,1895.5 ; v1(3275,1100) 3275,1528.94 3271.87,1528.94 3260.15,1540.66 3260.15,1556.68 3256.3,1560.54 3256.3,1583.7 3175,1665 3175,1775 OLED/TFT.4 3020.47,1830.47 2879.53,1830.47 2855,1855 2694.96,1855 2639.96,1910 2375.55,1910 2344.25,1878.7 2344.25,1877.72 R11.1 2336.54,1869.02 2305,1837.48 C16.2 2301.65,1771.81 2256.3,1771.81 2242.99,1785.12 C15.1 2185,1779.21 2148.19,1742.4 U4.5 2058.31,1742.4 2033.5,1767.21 2033.5,1816.5 1954.5,1895.5 1540,1895.5
  Bottom Layer w20: pad.@340,3200 341.87,3198.13 396.24,3198.13 567.82,3026.55 567.82,2692.18 670,2590 v1(670,2540) 670,2155.71 v1(664.67,2150.38) 665,2150.05 665,2057.43 v1(663.79,2056.21) ; v1(345,575) 375,605 375,845 430,900 v1(430,915) 430,1020 390,1060 390,1160 485,1255 v1(485,1320) 485,1470 666.89,1651.89 v1(666.89,1958.11) ; ICM2602.1 2840,589.47 2909.48,658.95 2980.53,730 3208.28,730 3310,831.72 3310,1065 v1(3275,1100)
VCC5V: C11.1 C13.1 C14.2 C17.1 C18.2 pad.@340,3090 R10.1 TTL.1 U1.2 U1.4 U3.3 U4.1 U4.3 U5.1 U5.3 无线串口模块.7 编码器1.2 编码器2.2 | length 9772.1
  Top Layer w10: U5.3 3402.72,1568.47 3438.47,1568.47 v1(3438.66,1568.66)
  Top Layer w20: 编码器1.2 307.53,1432.47 260.1,1432.47 195,1497.57 195,1781.72 195,1790 206.72,1801.72 270,1847.8 270,1951.34 ; 编码器2.2 270,1951.34 ; 500,2459.17 500,2439.29 451.56,2390.85 450.1,2389.22 280.41,2177.78 270,2164.82 270,1951.34 ; v1(500,2475) 500,2467.22 508.05,2459.17 528.05,2459.33 531.37,2459.36 590.85,2459.84 610.68,2460 610.77,2460 627.34,2460 663.94,2423.4 663.94,2391.06 688.7,2366.3 1016.3,2366.3 1105,2455 1265,2455 U1.4 U1.2 1425,2715 1530,2715 1635.06,2820.06 1635.06,3100 ; R10.1 850.47,3181.54 v1(854.43,3185.5) ; v1(1477.89,3135) 1477.89,3104.11 U3.3 1635.06,3100 ; v2@1637.84,1664.88 C13.1 1746.67,1663.21 1868.33,1663.21 C14.2 1874.25,1665.79 1931.91,1665.79 ; U4.3 1952.01,1667.6 1946.42,1673.19 1931.91,1673.19 1920.2,1684.91 1920.2,1725.1 1935.69,1740.59 1960.04,1740.59 U4.1 ; v1(2330,3100) 1791.89,3100 C11.1 1788.11,3100 1635.06,3100 ; v1(3435,1642.4) U5.1 3306.06,1642.4 C18.2 3295,1731.02 3348.98,1785 C17.1 3354.88,1825.14 3332.34,1847.68 3325.27,1847.68 3313.55,1859.4 3313.55,1993.55 v1(3315.79,1995.79) 3316.44,1996.44 3316.44,2031.44 3350,2065 3439.43,2065 无线串口模块.7@3447.6,2056.83
  Bottom Layer w20: pad.@340,3090 501.98,2928.02 501.98,2476.98 v1(500,2475) ; v1(854.43,3185.5) 1429.5,3185.5 1477.89,3137.11 v1(1477.89,3135) ; U1.4 1315,2494.43 1335.47,2473.96 1335.47,2472.06 1637.84,2169.69 v2(1637.84,1666.71) ; v1(2330,3100) 2885,3100 2945,3040 2945,2367.89 3315.79,1997.1 v1(3315.79,1995.79)
  Bottom Layer w40: v1(3435,1642.4) 3435,1572.32 v1(3438.66,1568.66) 3512.32,1495 3655,1495 TTL.1
VCCBAT: C1.1 C2.2 D2.A DCOUT1.1 DCOUT?2.1 Q1.1 R6.1 R7.1 R20.1 U2.4 | length 10138.8
  Top Layer w20: R20.1 794.25,2312.28 794.25,2280.75 v1(794.97,2280.03)
  Top Layer w30: U2.4@3461.89,2622.2 3464.09,2620 U2.4 ; R6.1@3570,2628.46 3570.77,2629.23 3570.77,2704.23 C2.2 ; 3718.46,2618.46 3725,2625
  Top Layer w40: U2.4@3461.89,2622.2 C1.1 ; U2.4 R7.1@3655,2620 ; R7.1 3718.46,2618.46
  Top Layer w50: v3(410,2605) D2.A ; v4(3525,1085.16) 3525,1238.94 Q1.1 3603.27,1327.21 3603.27,1393.27 3680.47,1470.47 3680.47,1471.09 3810,1600.62 3810,1735.1 3786.73,1758.36 3786.73,1877.2 3785,1878.93 3785,1915 3678.83,2021.17 3678.83,2300 3725,2346.17 3725,2625
  Bottom Layer w20: 182.17,1775 425,1775 794.97,2144.97 v1(794.97,2280.03)
  Bottom Layer w50: v3(410,2605) 410,2301.26 272.01,2163.26 272.01,1993.32 182.17,1903.48 182.17,1775 182.17,1597.17 150,1565 150,600 295,455 730,455 ; DCOUT1.1 645,370 730,455 ; DCOUT?2.1 1045,214.69 804.68,455 ; v4(3525,1085.16) 3525,594.32 3385.68,455 804.68,455 ; 730,455 804.68,455
VCCCAM: C19.1 C20.2 R12.1 U5.5 摄像头接口.16 | length 2571.1
  Top Layer w20: v1(2632.26,2052.26) 2634.53,2054.53 3115.47,2054.53 v1(3200,1970) ; v1(3539.32,1814.32) 3539.32,1739.85 3508.15,1708.68 U5.5 3592.28,1642.4 C19.1@3610,1660.12 ; R12.1 3615,1665.12 C19.1@3610,1660.12 ; C20.2 3713.35,1660.12 C19.1@3610,1660.12
  Bottom Layer w20: 摄像头接口.16 2130,2760.04 2264.53,2625.51 2264.53,2615 ; 2265.47,2615 2265.47,2419.06 v1(2632.26,2052.26) ; v1(3200,1970) 3271.56,1898.44 3355.68,1814.32 v1(3539.32,1814.32)
VCCOP: 
VCCSteer: C3.2 C4.1 L1.1 R4.2 R5.2 Steer.2 | length 1092.4
  Top Layer w50: Steer.2 2950.94,3309.06 2950.94,3110 ; L1.1 3030.16,2715.24 2951.89,2793.5 C4.1 2950.94,2920.94 2950.94,3110 ; C3.2 3240,3123.46 3253.46,3110 2950.94,3110
pads on no net: ICM2602.7 ICM2602.8 R3.1 U1.22 U1.23 U1.26 U1.29 U1.32 U1.33 U1.42 U1.43 U1.45 U1.47 U1.48 U1.49 U1.50 U1.51 U1.52 U1.53 U1.64 U1.65 U1.66 U1.69 U1.70 U1.71 U1.72 U1.73 U1.78 U1.79 U1.80 U1.107 U1.109 U1.110 U1.111 U1.112 U1.113 U1.114 U1.115 U1.116 U1.117 U1.118 U1.119 U1.120 U1.121 U1.122 U2.0 U4.4 U5.4 摄像头接口.10 无线串口模块.2 无线串口模块.8 编码器1.5 编码器1.6 编码器2.5 编码器2.6
copper on no net:
  other v1: 3355,995 590,1230 480,1745 561.26,2003.79 3723.67,2082.69 3740,2160 2995,2265 1620,2735 2549.13,3143.17 2150,3255 530,3285 1935,3300

## Polygon pours and split planes (outlines as drawn)
GNDBAT on Bottom Layer "NONET_L-01_P-001" (solid, remove dead copper, pour order 1): 215,3393.59 3675,3400 3675,3375 3975,3075 3975,285 3775,85 3755,105 215,105 215,280 5,490
GNDBAT on Top Layer "NONET_L-01_P-001" (solid, remove dead copper, pour order 0): 235,3320 305,3390 3675,3390 3675,3385 3774.14,3269.29 3950,265 3785,100 295,100 210,185 210,350 140,350 -0.66,490.66

## Keep-outs
Keep-Out Layer:
  lines w31.5: 220,3255 cw(c352.5,3262.5) 345,3395 ; 221.26,3265 16.83,511.35 ccw(c196.59,529.76) 215,350 215,225 ccw(c337.5,217.5) 330,95 ; 340,3395 3620,3395 cw(c3627.5,3262.5) 3760,3270 ; 345,95 3680,95 ccw(c3687.5,227.5) 3820,220 ; 3759.53,3275 3959.69,519.61 ; 3819.45,225 3819.45,369.5 ccw(c3788.54,536.76) 3955.8,567.67

## Silkscreen, mask and mechanical layers (free items; w line width, h text height)
Top Overlay:
  text "33.9" at 2784.45,3275 h50 r90
  text "VCC" at 2555.05,3240.55 h50
  text "GNDBAT" at 3139.45,3190 h50 r90
  text "3V3" at 429.45,3175 h50 r90
  text "5V" at 424.45,3055 h50 r90
  text "0N" at 239.13,2395 h78.74 r90
  text "VCC5V" at 3430.05,1970.55 h50
  text "VCC5V" at 235.05,1860.55 h50
  text "GND5V" at 427.56,1853.11 h50
  text "GND5V" at 490,1535.55 h50
  text "33.7" at 244.56,1489.88 h50 r90
  text "33.6" at 169.45,1480 h50 r90
  text "VCC5V" at 105.05,1395.55 h50
  text "GND5V" at 2640,440.55 h50
  text "VCC3V3" at 2810.05,440.55 h50
  text "-" at 405,400 h100
  text "-" at 875,390 h100
  text "+" at 620,384.64 h100
  text "+" at 1080,369.64 h100
Bottom Overlay:
  text "VCCSteer" at 3014.45,3374.95 h50 r90

## Dimensions
3721.34,3356.34 to 4195,10 on Top Overlay

## Text inside footprints (layer, text, board x,y; h text height)
OLED/TFT: Top Overlay "16" at 3050,1220 h50 r270; Top Overlay "15" at 2950,1220 h50 r270; Top Overlay "11.9" at 2915,2050 h50; Top Overlay "GND5V" at 3025,2050 h50
摄像头接口: Top Overlay "02.1" at 2855,3085 h50 r180; Top Overlay "00.0" at 2855,3140 h50 r180; Top Overlay "00.7" at 2060,3005 h50 r180; Top Overlay "VCCAM" at 2065,2900 h50 r180